# Altium PCB TIDA_010057.PcbDoc (part 9 of 9)
Units mil, origin at the board's own origin, x right, y up, seen from the top; angles counter-clockwise.
Board outline 1771.65 x 3543.31 mil, 12 copper layers (Top Layer, GND1, Signal Layer 1, GND2, POWER1, POWER2, GND4, POWER3, GND6, Signal Layer 2, GND7, Bottom Layer), stack 62.79 mil thick; 593 components, 374 nets, 1805 pads, 1029 vias.
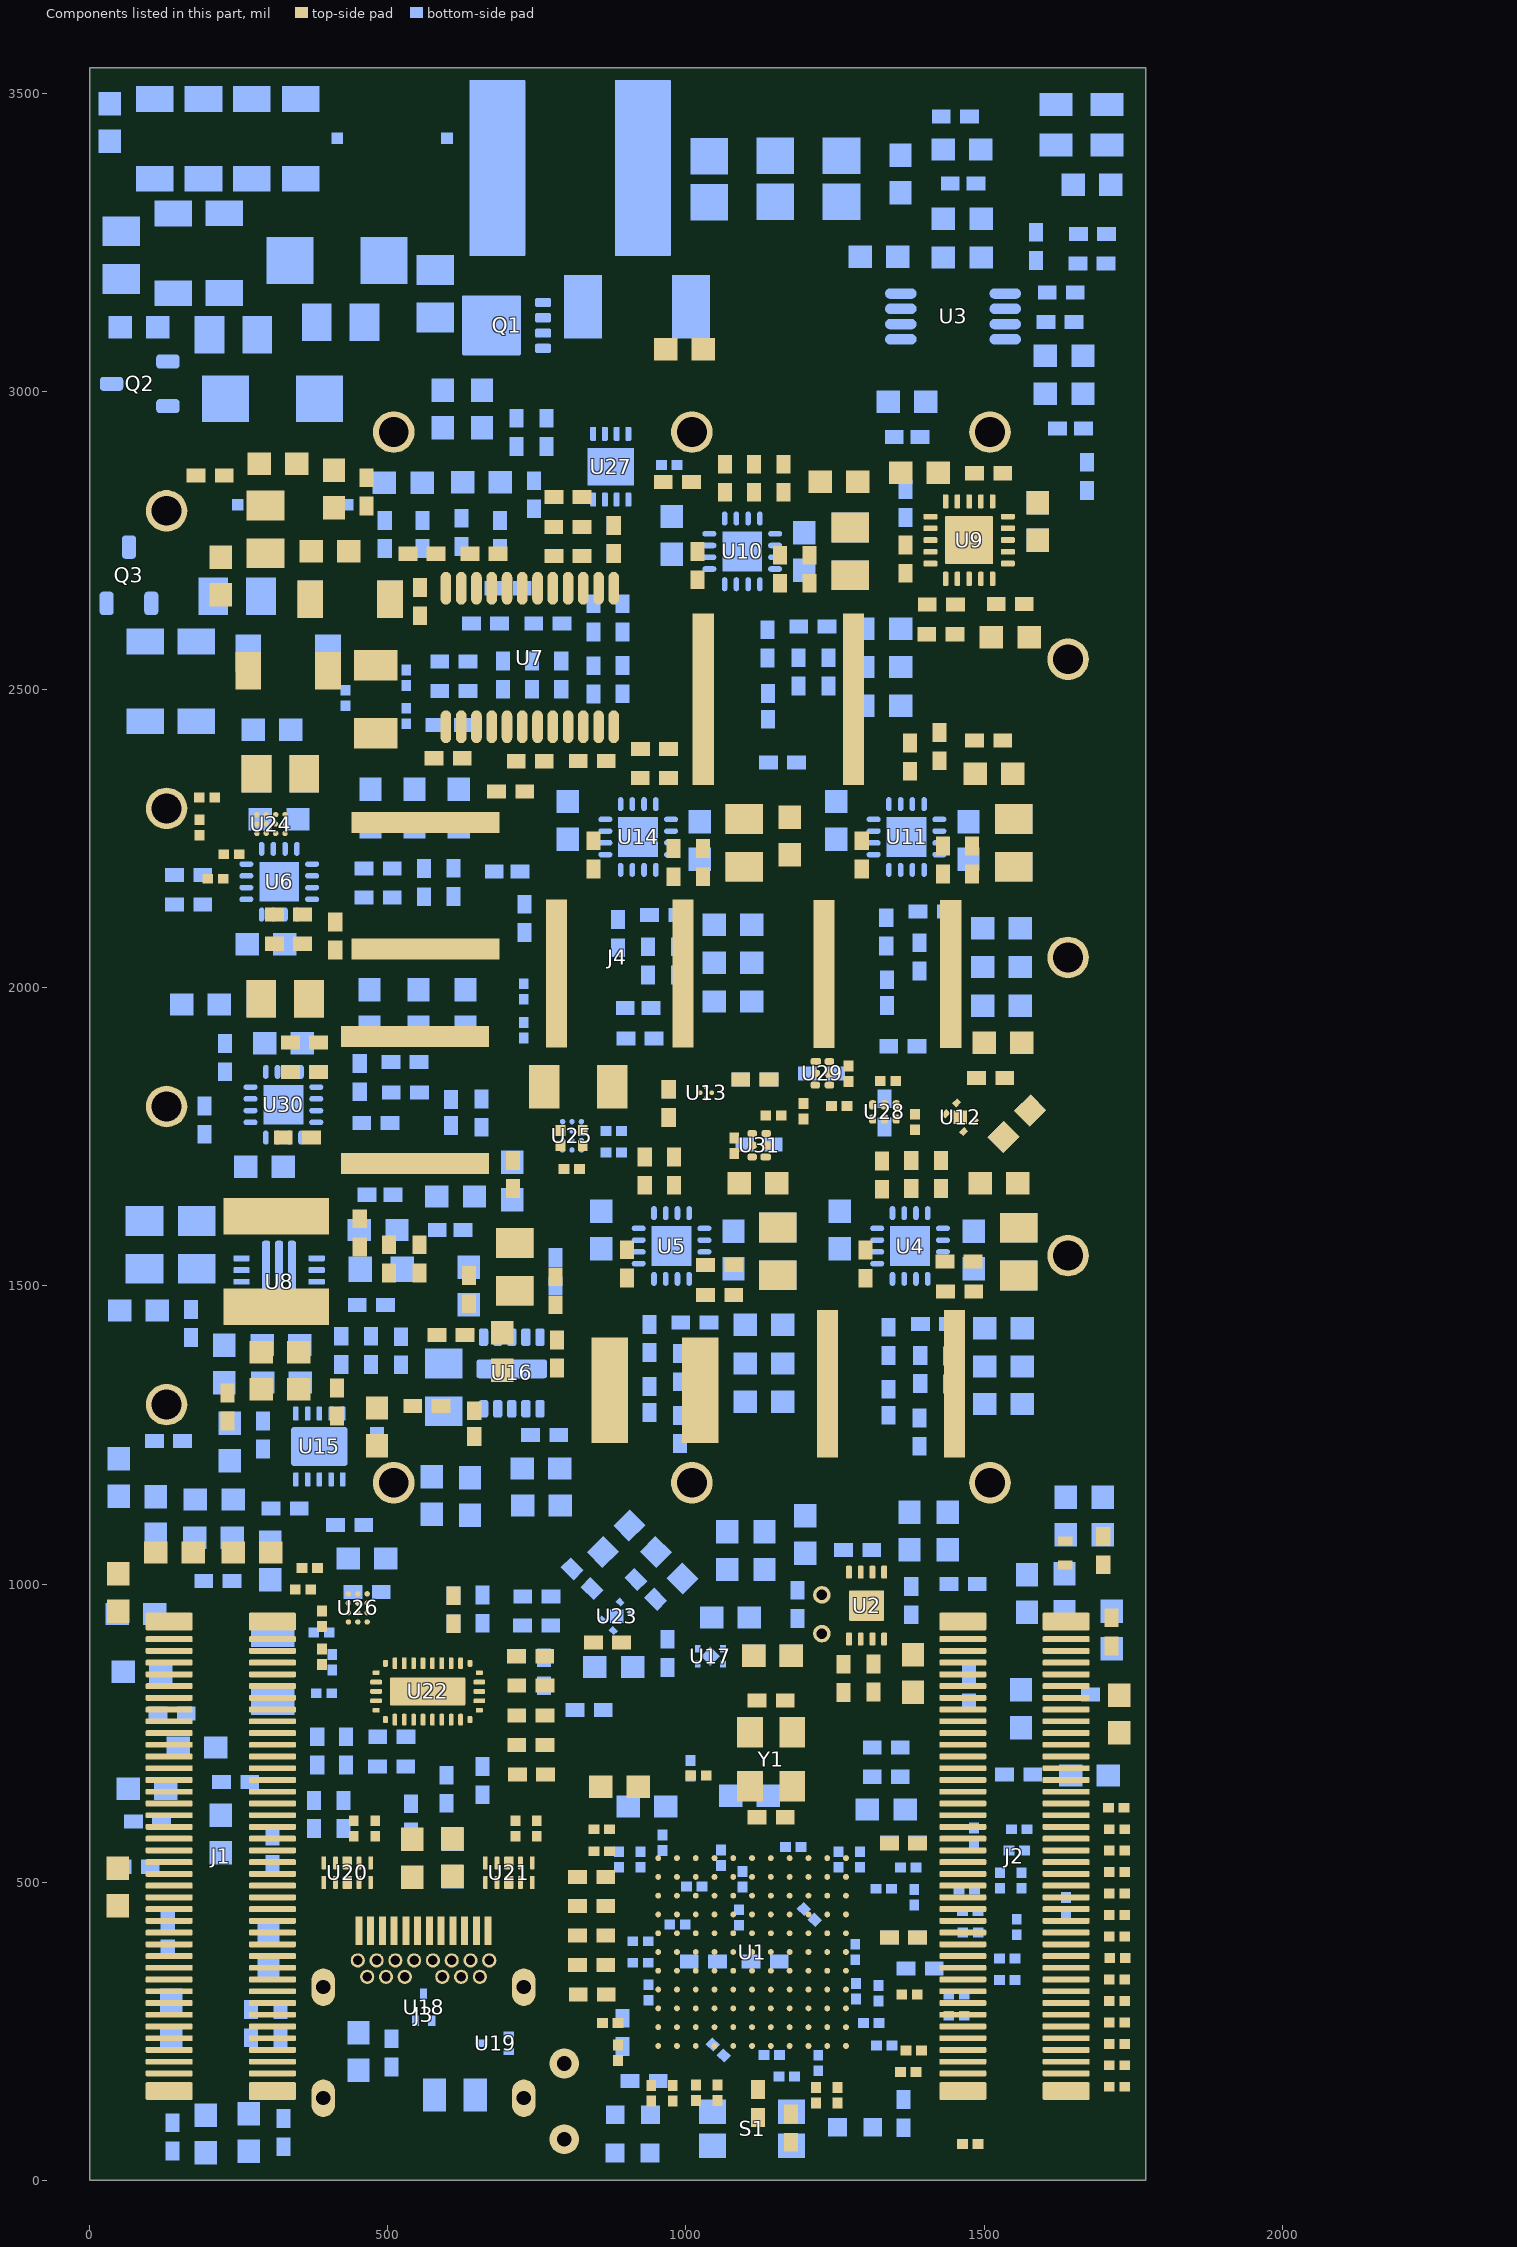
[diagram p17: the components of this part, seen from the top]

## Other copper (continued)
Bottom Layer:
  rectangle net GND_SIG: 1050,545 1071,564
  rectangle net GND_SIG: 1282,542 1301.5,560
  region net NetL42_1: 1591.58,996.08 1591.58,1040.76 1582.09,1050.25 1554.67,1050.25 1546.63,1042.21 1546.63,996.25 1546.55,996.16
  pour cut-out: 240.76,163.93 231.93,172.76 227.24,168.07 226.24,168.07 235.07,159.24
  pour cut-out: 1142.43,349.59 1136.67,355.33 1130.02,348.76 1130.02,347.75 1134.01,343.76 1136.6,343.76
  region net NetC208_2: 172,2644 131,2603 92,2603 88,2599 88,2562 91,2559 200,2559 211,2570 211,2619 232,2640 232,2677 226,2683 183,2683 172,2672
  region net NetL43_1: 16,2549 20,2545 37,2545 42,2550 42,2660 37,2665 19,2665 16,2662
  region net HVGND: 526,2684 460,2684 457,2681 457,2626 463,2620 526,2620
  region net NetL43_1: 43,1108 66,1085 66,1079 45,1058 37,1058 25,1070 25,1101 27,1103
  region net 3.3V: 1745,762 1738,769 1730,769 1709,748 1709,740 1718,731 1741,731 1745,735
  region net VBUS: 1506,1690 1512,1684 1512,1675 1491,1654 1479,1654 1459,1674 1459,1684 1465,1690
  region net VBUS: 1240,2867 1244,2863 1244,2852 1223,2831 1210,2831 1190,2851 1190,2861 1196,2867
  region net NetC80_1: 1069.5,2801 1059.5,2811 957.5,2811 957.5,2771 958.5,2770 1009.5,2770 1020.5,2781 1058,2781 1062,2777 1068,2777 1069.5,2778.5
  pour cut-out: 363,544 370,551 370,564.43 365,564.43 363,562.43
  region net VBUS: 1456.49,2376.1 1498.45,2376.22 1504.22,2370.45 1504.22,2360.67 1484.35,2340.8 1470.8,2340.8 1450.58,2361.02 1450.58,2370.19
  region net 1V8_VDD_RX: 1549.91,2556.14 1538.42,2544.66 1515.15,2544.66 1493.33,2522.83 1493.33,2509.53 1499.21,2503.65 1542.35,2503.65 1564.26,2525.56 1564.26,2550.11 1558.24,2556.13
  region net VCC_FX3_TXVDDQ: 1073,664 1095,664 1095,625 1055,625 1053,627 1053,644
  region net I2C_1V8: 1152,1018 1164,1006 1200,1006 1201,1005 1201,975 1199,973 1142,973 1113,1002 1113,1044 1152,1044
  region net VCC_FX3_VIO: 1257,1029 1263.35,1035.35 1277.35,1035.35 1281,1039 1281,1069 1278,1072 1181,1072 1181,1031 1183,1029
  region net NetC96_1: 1086,1191 1076,1181 1076,1138 1069,1131 1051,1113 1051,1068 1154,1068 1182,1096 1219,1096 1219,1191
  region net VCC_FX3_RXVDDQ: 1356,1077 1394,1077 1394,980 1356,980
  region net VCC_FX3_DVDD: 1420,1078 1458,1078 1458,990 1456,988 1423,988 1420,991
  region net NetC46_1: 1356,1140 1459,1140 1487,1112 1541,1112 1595,1166 1723,1166 1728,1161 1728,1131 1722,1125 1606,1125 1548,1067 1492,1067 1459,1100 1356,1100
  region net NetL42_1: 15,2960 22,2967 94,2967 114,2987 151,2987 151,2908 143,2900 23,2900 15,2908
  region net NetC241_1: 228,3127 94,3127 94,3038 96,3036 152,3036 154,3038 154,3059 156,3061 226,3061 228,3063
  region net "HV FB": 13,3003 16,3000 60,3000 62,3002 62,3072 74,3084 74,3135 84,3145 261,3145 261,3210 257,3214 16,3214 13,3211
  region net NetC30_1: 385,3181 297,3181 296,3182 296,3329 289,3336 103,3336 93,3326 93,3248 88,3243 18,3243 14,3247 14,3340 14,3408 14,3440 55,3440 55,3399 75,3379 385,3379
  region net NetC25_1: 453,3179 612,3179 618,3185 618,3529 616,3531 538,3531 537,3530 537,3341.08 537.53,3340.55 537.53,3306.53 506,3275 453,3275
  region net GND_SIG: 1733,975 1734,974 1734,935 1733,934 1695,934 1692,937 1692,974 1693,975
  region net PGND: 333.39,1885.39 331,1883 331,1840.5 326.78,1836.27 326.78,1812.72 329,1810.5 354.5,1810.5 357,1813 357,1879.5 351,1885.5
  region net NetC157_1: 258,1916 253,1911 253,1903 258,1898 258,1872.83 258,1831 260,1829 279,1829 281,1831 281,1838 292,1849 320,1849 320,1868 313,1875 313,1889 313,2014 263,2014 240,1991 198,1991 198,1952 200,1950 243,1950 258,1935
  region net VDD_FPGA: 176,1990 190,2004 203,2004 211,2012 211,2035 201,2045 173,2045 131,2003 131,1955.02 133.02,1953 176,1953
  region net PGND: 324,2257 324,2216 319,2211 319,2187 321,2185 347,2185 351,2189 351,2216 355,2220 355,2258 353,2260 327,2260
  region net NetC62_1: 251,2372.22 243.03,2364.25 243.03,2354.22 251,2346.27 251,2265 254,2262 254,2217 251,2214 251,2207 253,2205 274,2205 274,2213 283,2222 310,2222 313,2225 313,2242 306,2249 306,2302 305,2303 305,2447 299,2453 254,2453 251,2450
  region net NetC61_1: 634,2244.5 638,2248.5 638,2289.5 635,2292.5 614,2292.5 456,2292.5 452,2288.5 452,2247.5 455,2244.5
  region net NetC59_2: 289,2134 286,2131 286,2117.39 291.39,2112 295,2112 295,2134
  region net NetC59_1: 244,2055 245,2054 283,2054 284,2055 284,2090 283,2091 274,2091 271,2094 271,2151 252,2151 244,2143
  region net NetC83_1: 1609,2835 1609,2793 1567,2793 1562.8,2797.2 1562.8,2830.8 1567,2835
  region net PGND: 1159,2726 1165,2720 1183.5,2720 1183.5,2712 1181.5,2710 1116.5,2710 1112.5,2714 1112.5,2728.04 1121.49,2737.02 1132.5,2726
  region net NetC83_1: 1272,2444 1274,2442 1317,2442 1320,2445 1320,2462 1320,2620 1316,2624 1275,2624 1272,2621
  region net NetC80_2: 1028.5,2766 1047,2766 1051,2762 1051,2722 1047,2718 1005.5,2718 1005.5,2743
  region net NetC81_1: 1161,2805.5 1154.69,2811.82 1145.32,2811.82 1139.01,2805.5 1124.5,2805.5 1120,2801 1120,2778 1122,2776 1132.5,2776 1139.01,2769.49 1139.01,2739.99 1142,2737 1312,2737 1313.5,2738.5 1313.5,2804.5 1312.5,2805.5
  region net GND_SIG: 931,563 941,563 944,560 944,554 932,542 879.8,542 879.8,560.8 882,563
  region net GND_SIG: 886,560 901,560 901,542 886,542
  region net VCC_FX3_RXVDDQ: 975,548 971,544 968,544 964,548 964,562 974,562 975,561
  region net NetC61_1: 79,756 90,745 168,745 168,707 95,707 84.58,717.42 29.58,717.42 26,721 26,768 30,772 44,772 60,756
  region net VCC_AUX_1V8: 267,369 267,311 259,303 259,271 333,271 334,272 334,316 330,320 330,368 325,373 271,373
  region net 3.3V_AVDD: 1742,832 1743,831 1743,800 1742,799 1710,799 1710,831 1711,832
  region net 1V8_VDD_RX: 1571,908 1581,898 1581,843 1581,803 1544,803 1543,804 1543,871 1524,890 1524,904 1528,908
  region net NetC22_1: 1388,3474 1401,3487 1527,3487 1554,3460 1738,3460 1742,3464 1742,3525 1736,3531 829,3531 820,3522 820,3236 829,3227 976,3227 976,3357 986,3367 1292,3367 1302,3377 1383.54,3377 1388,3381.46
  region net NetC26_2: 1385,3353 1387,3351 1387,3162 1381,3156 1343,3156 1335,3164 1335,3350 1338,3353
  region net NetQ1_1: 749,3196 859,3196 859,3089 750,3089 746,3093 746,3193
  pour cut-out: 1153.91,229.88 1163.12,229.88 1163.12,223.12 1163,223 1154,223 1154,229.79
  region: 1619.54,1594.77
  region: 1619.54,1594.77
  region: 1619.54,1594.77
  region: 1619.54,1594.77
  region: 1619.54,1594.77
  region: 1619.54,1594.77
  region net 1.8V_AVDD: 1500,678 1519,659 1560.65,659 1566,664.35 1566,697.65 1571.35,703 1659.83,703 1666,696.83 1666,657.17 1658.83,650 1589,650 1570,631 1519,631 1504,646 1455.87,646 1453,648.87 1453,677 1454,678
  region net AVSS: 31,700 26,695 26,593 29,590 81,590 83,592 83,684 86,687 86,696 82,700
  region net GND_SIG: 86,514 148,514 150,516 150,541 157,548 177.2,548 180.61,551.41 180.61,573.16 184,576.56 152.56,576.56 124,548 124,535 97.92,535 86,523.08
  region net 1V8_AVDD_IO_TX: 190,779 211.24,779 215,782.76 215,817 208,824 196.11,824 190,817.89
  region net NetC41_1: 1432.12,1649.41 1441.1,1640.5 1597,1640.5 1598,1639.5 1598,1573.5 1596,1571.5 1421,1571.5 1419,1573.5 1419,1606.5 1414.5,1611 1403,1611 1401,1613 1401,1639.5 1402,1640.5 1420.72,1640.5 1429.63,1649.41
  region net NetC39_1: 1351,1636 1341,1646 1239,1646 1239,1606 1240,1605 1291,1605 1302,1616 1339,1616 1344,1611 1349,1611 1351,1613
  region net NetC39_2: 1306,1601 1329,1601 1332,1598 1332,1555 1329,1552 1285,1552 1285,1580
  region net NetC46_1: 1519,1456 1521,1454 1521,1282 1519,1280 1478,1280 1476,1282 1476,1454 1478,1456
  region net PGND: 1443.71,1562 1457.1,1548.62 1457.1,1534.1 1418.8,1495.8 1406.2,1495.8 1400.86,1501.14 1400.86,1523.07 1390.93,1533 1343,1533 1343,1600 1409,1600 1409,1564 1411,1562
  region net NetC56_1: 1018.95,1640.5 1026.31,1647.86 1034.63,1647.86 1041.98,1640.5 1194,1640.5 1195,1639.5 1195,1573.5 1022.5,1573.5 1020,1576 1020,1608 1017,1611 1003,1611 1001,1613 1001,1631 1010.5,1640.5
  region net NetC54_1: 951,1636 941,1646 839,1646 839,1606 840,1605 891,1605 902,1616 940,1616 945,1611 948,1611 951,1614
  region net NetC54_2: 858,1583 893,1583 911,1601 930,1601 933,1598 933,1557 928,1552 858,1552
  region net NetC96_1: 1074,1274 1076,1272 1119,1272 1122,1275 1122,1292 1122,1450 1118,1454 1077,1454 1074,1451
  region net PGND: 1049,1561 1065,1545 1065,1510 1028,1510 1003.71,1534.29 1003.71,1561.71 1005,1563 1009,1563 1011,1561
  region net NetC103_1: 1554.34,2333.12 1560.96,2326.5 1588,2326.5 1589,2325.5 1589,2259.5 1587.5,2258 1417,2258 1414,2261 1414,2291 1408,2297 1398,2297 1395,2300 1395,2323 1398.5,2326.5 1539.19,2326.5 1545.8,2333.12
  region net NetC102_1: 1345,2322 1335,2332 1233,2332 1233,2292 1234,2291 1285,2291 1296,2302 1333,2302 1338,2297 1343,2297 1345,2299
  region net NetC102_2: 1287,2270 1304,2287 1323,2287 1326,2284 1326,2256 1323,2253 1290,2253 1287,2256
  region net NetC110_1: 1521,2130.01 1516.01,2135 1471,2135 1466.02,2130.02 1466.02,1955 1471.02,1950 1516.01,1950 1521,1954.99
  region net PGND: 1444,2247 1457,2234 1457,2210 1456,2209 1401,2209 1397.58,2212.42 1397.58,2249.58 1400.5,2252.5 1406,2247
  region net 3.3V: 1454,1758 1452,1756 1452,1718 1459,1711 1547,1711 1565,1729 1565,1745 1534,1776 1533,1776 1515,1758
  region net NetC196_1: 993.37,2328.84 996.23,2325.99 996.82,2326 1138.5,2326 1139,2325.5 1139,2259.5 1137.5,2258 966,2258 963,2261 963,2291 958,2296 947,2296 944,2299 944,2322 948,2326 980,2326 982.84,2328.84
  region net NetC176_1: 895,2322 885,2332 783,2332 783,2292 784,2291 835,2291 846,2302 881.5,2302 888,2295.5 894,2295.5 895,2296.5
  region net NetC176_2: 855,2288 875,2288 877,2286 877,2241 875,2239 831,2239 831,2264
  region net NetC132_1: 1022,1945 1024,1943 1067,1943 1070,1946 1070,1963 1070,2121 1066,2125 1025,2125 1022,2122
  region net PGND: 991,2248 1003,2236 1003,2208.21 996.95,2202.16 954.61,2202.16 937,2219.78 937,2248
  region net NetC198_1: 1106,1874 1108,1872 1108,1834 1064,1834 1061,1837 1061,1872 1063,1874
  region net NetC132_1: 999.26,1816.01 996.24,1813 958,1813 958,1856.76 962.26,1861.01 997.26,1861.01 999.26,1859.01
  region net NetC116_2: 267.9,1565 267,1565.9 267,1614 236.95,1614 235.87,1612.91 235.87,1589.8 241,1584.67 241,1543 242,1542 268,1542
  region net NetC116_1: 304,1587 284.79,1587 276.96,1594.83 277,1612.05 277,1624 282,1629 319,1629 342,1606 342,1597 336,1591 331,1591 325,1585 325,1441 322,1438 314,1438 311,1441 311,1580
  region net PGND: 351,1657 292,1657 280,1669 76,1669 60,1653 60,1586 62,1584 220,1584 220,1628 232,1640 335,1640 350,1625 350,1591 333,1574 333,1536 345,1536 345,1556 369,1580 369,1639
  region net NetC120_1: 266,1421 289,1444 289,1573 292,1576 301,1576 303,1574 303,1425 310,1418 310,1318 266,1318
  region net GND_A7: 495,1626 493,1628 493,1653 519,1653 535,1637 535,1626 535,1579 544,1570 544,1506 503,1506 503,1556 495,1564
  region net PGND: 785,1309 803,1291 803,1218 808,1213 808,1175 769,1175 769,1214 771,1216 771,1275.36 767.36,1279 750,1279 748,1281 748,1307 750,1309
  region net NetC187_1: 793,1471 789,1467 722,1467 716,1461 716,1402 714,1400 702,1400 700,1402 700,1460 692,1468 682,1468 682,1517 790,1517 793,1514
  region net VTX_5V: 765,1633 768,1636 790,1636 794,1632 794,1531 765,1531
  region net NetC188_2: 768,1376 766,1378 673,1378 669,1382 669,1426 666,1429 608,1429 601,1436 587,1436 562,1411 562,1345 766,1345 768,1347
  region net NetC181_1: 447,1278 432,1278 429,1275 424,1275 420,1279 420,1283.75 422.25,1286 446.34,1286 447,1285.34
  region net "ALTERNATE HV INPUT": 370,1274 321.67,1274 305.67,1258 286,1258 286,1290 303,1290 310.76,1297.76 370,1297.76
  region net PGND: 565,1261 567,1259 567,1249 565,1247 494,1247 492,1249 472.22,1249 463.66,1257.55 467,1261
  region net NetC121_1: 320,1064 308,1052 226,1052 219,1059 219,1156 224,1161 283,1161 309,1187 350,1187 350,1163 335.5,1163 320,1147.5 320,1112
  region net PGND: 272,1199 350,1199 350,1206 331,1225 272,1225
  region net NetC190_2: 446.02,1085.98 463.02,1085.98 477,1072 477,1024 516,1024 517,1025 517,1075 528,1085.98 649.98,1085.98 659,1095 659,1135 658,1136 555,1136 542,1123 485,1123 458,1150 458,1179 451,1186 420,1186 420,1139 444,1115 444,1088
  region net TX_5V: 322,1028 226,1028 221,1023 221,995 223,993 277,993 283,987 321,987 322,988
  region net TX_-5V: 414,1061 415,1062 453,1062 453,1004 457,1000 457,975 415,975 411,979 411,1059 414,1062
  region net VTX_5V: 70,1437.5 94,1413.5 94,1351 89,1346 67,1346 30,1383 30,1476 32,1478 70,1478
  region net VBUS: 512,2453 514,2451 538,2451 540,2449 540,2407 536,2403 452,2403 446,2409 446,2446 453,2453
  region net VTX_5V: 508,2567 530,2567 540,2557 540,2524.02 517.02,2524.02 510,2517 487.17,2517 452,2517 446,2523 446,2561 452,2567
  region net GND_SIG: 1248,560 1258,570 1266,570 1270,566 1270,560 1264,554 1264,542 1248,542
  region net VCC_FX3_VIO: 938,534 944,528 944,522 938,516 879,516 879,534
  region net NetC36_2: 244.5,2580.5 244.5,2593.5 249,2598 262,2611 262,2688 244.33,2705.67 232.73,2705.67 232.73,2914.33 311.47,2914.33 311.47,2727.53 355,2684 393,2684 393,2620 350,2620 331,2601 331,2543 317,2529 244,2529 244,2580
  region net VCC_3.3V_CDCE: 1018,963 987,932 962,932 957,927 957,892 1008.71,892 1014.71,886 1024,886 1033.13,895.13 1033.13,922.13 1035,924 1064,924 1064,963
  region net NetC164_1: 1058,886 1080,886 1083,883 1083,860 1087,856 1132,856 1134,858 1134,908 1132,910 1051,910 1049,908 1049,895
  region net HVM: 66,975 29,975 26,972 26,929 30,925 65.98,925 67,926.02 67,974
  region net HVGND: 109,3321 258,3321 258,3277 109,3277
  region net FX3_I2C_SDA: 1272,883 1265,890 1264.5,890 1264.5,875 1272,882.5
  region net NetC96_1: 319,457 314,462 199,462 186,449 186,443 199,443 207,451 274,451 281,444 281,405 319,405
  region net AVSS: 89,969 139,969 176,1006 176,1017 208,1017 208,994 193,979 183,979 150,946 150,910 93,910 89,914
  pour cut-out: 166,432 156,432 154,430 154,418 156,416 165,416 167,418 167,431
  pour cut-out: 1248,814 1241,807 1240,807 1250,797 1252,797 1257,802 1257,804
  text "'.Layer_Name'" at 584,-859 h60

## Silkscreen, mask and mechanical layers (free items; w line width, h text height)
Top Overlay:
  drawing of 168 lines, arcs and shapes, not listed
  text "REV:E2" at 636,3351 h40
  text "TIDA-010057" at 550,3342 h40
  text "A" at 917,1030 h25
  text "A" at 763,375 h25
  text ".Layer_Name" at 577,-858.49 h60
Bottom Overlay:
  lines w4: 1210.39,906.28 ccw(c1228,917) 1215,933 ; 1210.39,971.28 ccw(c1228,982) 1215,998
  lines w6: 321,1259 321,1304 334,1304 387,1304 ; 418,1151 442,1151 442,1173 ; 628,3229 628,3535 987,3535 987,3231 ; 766,233 836,233 836,169 ; 782,107 834,107 834,46 ; 838,926 803,891 803,834 817,820 889,820 ; 1364,1478 1377,1478 1381,1474 1381,1464 ; 1403.02,3433.27 1396.73,3433.27 1390,3440 1390,3446.28 1390,3504 1395,3509 1417,3509 ; 1574.15,3526.67 1578.89,3531.41 1683.82,3531.41 1689.93,3525.29 1689.93,3519.06
  lines w8: 149.6,2927.8 149.6,2940.16 151.11,2941.67 159.55,2941.67 ; 329.25,3062.55 430.23,3062.55 444.4,3048.38 444.4,3038.73 ; 346.66,1571.96 372.79,1571.96 ; 392.47,1558.41 392.47,1564.09 ; 726.72,2988.87 726.72,2993.93 730.65,2997.85 764.71,2997.85 782.68,3015.82 782.68,3036.81 782.68,3038.66 ; 775.7,2987.49 782.69,2994.49 796.91,2994.49 ; 1704.56,2976.3 1730.63,2976.3
  text "SDA" at 1323,969 h25
  text "SCL" at 1323,905 h25
  text "VBUS_USB" at 755,45 h25
  text ".Layer_Name" at 577,-858.49 h60
Top Paste:
  rectangle: 1380,1906 1457,2141
  rectangle: 1219,1905 1293,2139
  rectangle: 1202,2350 1295,2620
  rectangle: 1019,2349 1105,2620
  rectangle: 930,1908 1006,2141
  rectangle: 770,1906 845,2141
  rectangle: 447,2057 679,2127
  rectangle: 446,2213 680,2290
  rectangle: 430,1691 664,1770
  rectangle: 428,1854 661,1931
  region: 1464,1454 1393,1454 1393,1217 1464,1217
  rectangle: 1226,1217 1297,1454
  text ".Layer_Name" at 577,-858.49 h60
Bottom Paste:
  text ".Layer_Name" at 577,-858.49 h60
Top Solder:
  rectangle: 1375.41,1897 1462.02,2147.02
  rectangle: 1213.98,1898 1300,2147.02
  rectangle: 1196.34,2340.3 1298.7,2627.7
  rectangle: 1011.3,2340.3 1113.66,2627.7
  rectangle: 438.99,2046.87 687.01,2133.89
  region: 670.02,1775 421.99,1775 421.99,1687.69 670.02,1687.69
  region: 670.01,1936.13 421.99,1936.13 421.99,1849.4 670.01,1849.4
  region: 852.3,1899.98 852.3,2148.01 765.69,2148.01 765.69,1899.98
  region: 1014.13,1899.99 1014.13,2148.01 927.11,2148.01 927.11,1899.99
  rectangle: 438.98,2208.7 687.01,2295.31
  rectangle: 1381.41,1211.98 1468.02,1460.02
  rectangle: 1219.98,1211.98 1309,1460.02
  region: 1448.57,1794.41 1471.4,1794.41 1471.46,1794.34 1471.46,1771.58 1448.6,1771.58 1448.57,1771.62
  region: 1454.99,1814.74 1446.36,1806.11 1453.34,1799.13 1464.99,1799.13 1467.79,1801.93
  region: 1478.92,1790.79 1491.73,1777.98 1483.11,1769.36 1476.13,1776.34 1476.13,1787.99
  region: 1436.89,1796.63 1428.26,1788.01 1441.07,1775.2 1443.87,1778.01 1443.87,1789.65
  region: 1455.01,1766.87 1466.67,1766.87 1473.65,1759.9 1464.98,1751.23 1452.17,1764.03
  text ".Layer_Name" at 577,-858.49 h60
  text ".Layer_Name" at 577,-858.49 h60
Bottom Solder:
  region: 1041.08,895.36 1041.07,895.36 1024.76,879.06 1041,862.82 1057.17,878.99 1057.18,878.99 1057.18,879.26 1041.07,895.36
  region: 895.48,934.43 895.43,934.37 872.48,934.37 872.39,934.46 872.39,957.37 872.51,957.49 895.48,957.49
  region: 1048.87,897.97 1066.98,897.97 1066.98,885.69 1057.11,885.69 1048.87,893.93
  region: 1048.87,860.1 1048.87,864.07 1050.82,866.02 1057.18,872.38 1066.98,872.38 1066.98,860.1
  region: 1033.13,897.92 1015.02,897.92 1015.02,885.69 1024.95,885.69 1033.13,893.87
  region: 1024.93,872.33 1014.96,872.33 1014.96,860.13 1033.2,860.13 1033.2,864.06
  region: 897.64,969.11 889.01,977.74 876.2,964.93 878.99,962.14 890.65,962.11
  region: 907.07,959.68 915.74,951.01 902.93,938.21 900.13,941.01 900.13,952.74
  region: 865.17,953.89 852.33,941.05 860.96,932.42 867.87,939.34 867.87,951.19
  region: 877.35,929.87 888.99,929.87 891.79,927.07 878.99,914.26 870.37,922.89
  region: 318.1,1216.42 318.1,1245.76 338.75,1266.42 432.21,1266.42 452.65,1245.99 452.65,1215.81 432.76,1195.92 338.59,1195.92
  text ".Layer_Name" at 577,-858.49 h60
Drill Guide:
  text ".Layer_Name" at 577,-858.49 h60
M1 Board Outline:
  the board outline again, w10
M2 Board Dimensions:
  rectangle: 125,-400 500,-275
  rectangle: 0,-275 125,-150
  lines w7: 0,-275 1000,-275 ; 125,-400 125,-150 ; 250,-400 250,-150 ; 500,-400 500,-150 ; 750,-400 750,-150 ; 0,-400 0,-150 1000,-150 1000,-400 0,-400
  lines w10: 0,0 0,3543.31 1771.65,3543.31 1771.65,0 0,0
M3 3D STEP Top:
  text ".Layer_Name" at 577,-858.49 h60
M4 3D STEP Bottom:
  text ".Layer_Name" at 577,-858.49 h60
M5 Assembly Top:
  circle w4: c1228,917 r18.44
  circle w4: c1228,982 r18.44
  circle w4: c796,69 r29.73
  circle w4: c796,196 r29.73
  lines w3: 392,994 404,994 420,1010 420,1011 ; 1043.29,1854.08 1049.14,1848.22 1049.14,1841.99 1044.74,1837.59 ; 1475.97,1800.99 1482.48,1807.5 1488.35,1807.5 1493.46,1802.39 ; 1524,67 1668,67 1679,78 1679,567 ; 1682,574 1682,688 ; 1679,567 1675,563 1683,563 1679,567 ; 1682,688 1678,684 1686,684 1682,688
  lines w4: 1055,1733 1062,1733 ; 1288.75,1885.53 1295.47,1885.53 ; 203,1429 423,1429 423,1651 207,1651 203,1651 203,1429 ; 419,1685 419,1940 674,1940 674,1685 419,1685 ; 438.03,2044 691,2044 691,2299 438.03,2299 438.03,2044 ; 762,1896.08 762,2151.08 1017,2151.08 1017,1896.08 762,1896.08 ; 836,1215 1061,1215 1061,1437 844,1437 836,1437 836,1215 ; 1012,2341.3 1306.7,2341.3 1306.7,2627.7 1012.7,2627.7 1012,2627 1012,2341.3 ; 1214,1896.08 1214,2151.08 1466,2151.08 1466,1896.08 1214,1896.08 ; 1216,1209 1216,1459 1471,1459 1471,1209 1216,1209
  lines w10: -292,-930.17 6308,-930.17 ; -292,-726.83 6310,-726.83 ; -292,-523.5 -292,-1133.5 3713,-1133.5 6310,-1133.5 6310,-523.5 -291.5,-523.5 -291.5,-1133.5 1284,-1133.5 ; 2173,-1133.5 2173,-523.5 ; 3440,-726.83 3440,-523.5 ; 4280,-726.83 4280,-523.5 ; 4902,-1140 4902,-937.17
  text "L13" at 1123,2483 h30
  text "L11" at 530,2184 h30
  text "L25" at 864,2018 h20
  text "L24" at 1314,2007 h20
  text "L27" at 511,1804 h30
  text "L19" at 274,1527 h20
  text "L6" at 1323,1315 h20
  text "L17" at 913,1305 h30
  text "SDA" at 1147,974 h20
  text "SCL" at 1148,919 h20
  text "PGND" at 761,137 h20
  text "VBUS_USB" at 747,12 h20
  text "COMPONENTS MARKED 'DNP' SHOULD NOT BE POPULATED." at 3459.5,-330.5 h60
  text "ASSEMBLY VARIANT:" at 3459,-446 h60
  text ".VariantName" at 4495,-446 h60
  text "PCB VIEWED FROM TOP SIDE" at -228.5,-655.67 h60
  text "BOARD #:" at 2248,-655.67 h60
  text ".PRJ_Number" at 2793.5,-655.67 h60
  text "REV:" at 3638,-655.67 h60
  text ".PCB_Rev" at 3929.5,-655.67 h60
  text "SVN REV:" at 4476,-655.67 h60
  text ".VersionControl_RevNumber" at 4982,-655.67 h30
  text "'.Layer_Name'" at 926,-847 h60
  text "TID #:" at 2248,-859 h60
  text ".TID" at 2793.5,-859 h60
  text "PLOT NAME =" at -228.5,-1064.34 h60
  text ".plot_File_Name" at 577,-1064.34 h60
  text "GENERATED    :" at 2250,-1064.34 h60
  text ".Print_Date" at 3119.5,-1064.34 h60
  text ".Print_Time" at 3848.5,-1064.34 h60
  text "TEXAS INSTRUMENTS" at 5113,-1064.34 h60
M6 Assembly Bottom:
  lines w3: 1277,582 1289,582 1292,579 1292,571 ; 1343,311 1352,311 ; 1406,524 1413,524 ; 1441,454 1444,454 ; 1489,322 1494,322 1497,319 1497,316
  lines w10: -292.5,-727.33 6309.5,-727.33 ; -290.5,-930.67 6309.5,-930.67 ; 1115.5,-1140.5 1115.5,-937.67 ; 1737.5,-727.33 1737.5,-524 ; 2577.5,-727.33 2577.5,-524 ; 3844.5,-1134 3844.5,-524 ; 4733.5,-1134 6309,-1134 6309,-524 -292.5,-524 -292.5,-1134 2304.5,-1134 6309.5,-1134 6309.5,-524
  text "COMPONENTS MARKED 'DNP' SHOULD NOT BE POPULATED." at 6102,-318 h60
  text ".VariantName" at 5058,-434 h60
  text "ASSEMBLY VARIANT:" at 6097,-434 h60
  text ".VersionControl_RevNumber" at 1035.5,-656.17 h20
  text "SVN REV:" at 1541.5,-656.17 h20
  text ".PCB_Rev" at 2088,-656.17 h60
  text "REV:" at 2379.5,-656.17 h60
  text ".PRJ_Number" at 3224,-656.17 h60
  text "BOARD #:" at 3769.5,-656.17 h60
  text "PCB VIEWED FROM BOTTOM SIDE" at 6246,-656.17 h60
  text "'.Layer_Name'" at 5287,-847 h60
  text ".TID" at 3224,-859.5 h60
  text "TID #:" at 3769.5,-859.5 h60
  text "TEXAS INSTRUMENTS" at 904.5,-1064.84 h60
  text ".Print_Time" at 2169,-1064.84 h60
  text ".Print_Date" at 2898,-1064.84 h60
  text "GENERATED    :" at 3767.5,-1064.84 h20
  text ".plot_File_Name" at 5440.5,-1064.84 h60
  text "PLOT NAME =" at 6246,-1064.84 h60
M9 Title Sheet:
  drawing of 57 lines, arcs and shapes, not listed
  text "1" at 739.84,8036.5 h70
  text "2" at 3235.5,8036.5 h70
  text "3" at 5724.84,8036.5 h70
  text "4" at 8231.51,8036.5 h70
  text "5" at 10730.5,8036.5 h70
  text "6" at 13235.5,8036.5 h70
  text "A" at -416.5,6893.5 h70
  text "A" at 14383.5,6893.5 h70
  text "B" at -416.5,4513.5 h70
  text "B" at 14383.5,4513.5 h70
  text "C" at -416.5,2138.5 h70
  text "C" at 14383.5,2138.5 h70
  text "PROJECT TITLE:" at 11343.5,277.5 h45
  text ".PRJ_Title" at 11393.5,144.17 h70
  text "DESIGNED FOR:" at 11343.5,-23.5 h45
  text ".PRJ_Customer" at 11393.5,-163.5 h70
  text "D" at -416.5,-231.5 h70
  text "D" at 14383.5,-231.5 h70
  text "FILE NAME:" at 11343.5,-323.5 h45
  text ".PCB_File_Name_No_Path" at 11393.5,-443.5 h70
  text "Texas Instruments (TI) and/or its licensors do not warrant the accuracy or completeness of this specification" at 6374,-605.34 h45
  text "ENGINEER:" at 11343.5,-613.5 h45
  text "LAYOUT BY:" at 12848.5,-613.5 h45
  text "or any information contained therein. TI and/or its licensors do not warrant that this design will meet" at 6329.01,-718 h45
  text "TESSOLVE" at 13187,-756 h60
  text ".PRJ_Engineer" at 11393.5,-768.49 h70
  text "the specifications, will be suitable for your application or fit for any particular purpose, or will operate in" at 6329.01,-830.67 h45
  text "ALTIUM DESIGNER VERSION:" at 12848.5,-923.5 h45
  text "an implementation. TI and/or its licensors do not warrant that the design is production worthy. You should" at 6329.01,-943.33 h45
  text "completely validate and test your design implementation to confirm the system functionality for your application." at 6374,-1056 h45
  text ".print_Scale" at 11393.5,-1056.83 h70
  text ".Application_BuildNumber" at 12899,-1056.83 h70
  text "1" at 739.84,-1263.5 h70
  text "2" at 3235.5,-1263.5 h70
  text "3" at 5724.84,-1263.5 h70
  text "4" at 8231.51,-1263.5 h70
  text "5" at 10730.5,-1263.5 h70
  text "6" at 13235.5,-1263.5 h70
M10 Fab Notes:
  drawing of 900 lines, arcs and shapes, not listed
  text "Layer" at 5845.5,7518.5 h60
  text "Name" at 6255.41,7518.5 h60
  text "Material" at 7195.15,7518.5 h60
  text "Thickness" at 8054.92,7518.5 h60
  text "Constant" at 8704.76,7518.5 h60
  text "Board Layer Stack" at 9274.62,7518.5 h60
  text "1" at 5845.5,7398.5 h60
  text "Top Overlay" at 6255.41,7398.5 h60
  text "2" at 5845.5,7278.5 h60
  text "Top Solder" at 6255.41,7278.5 h60
  text "Solder Resist" at 7195.15,7278.5 h60
  text "1.00mil" at 8054.92,7278.5 h60
  text "3.5" at 8704.76,7278.5 h60
  text "3" at 5845.5,7158.5 h60
  text "Top Layer" at 6255.41,7158.5 h60
  text "Copper" at 7195.15,7158.5 h60
  text "2.60mil" at 8054.92,7158.5 h60
  text "4" at 5845.5,7038.5 h60
  text "Dielectric1" at 6255.41,7038.5 h60
  text "FR-4 High_Tg" at 7195.15,7038.5 h60
  text "4.16mil" at 8054.92,7038.5 h60
  text "4.2" at 8704.76,7038.5 h60
  text "5" at 5845.5,6918.5 h60
  text "GND1" at 6255.41,6918.5 h60
  text "Copper" at 7195.15,6918.5 h60
  text "0.71mil" at 8054.92,6918.5 h60
  text "VENDOR MAY ADJUST SOLDERMASK WHEREVER SOLDAR MASK PADS ARE THE SAME SIZE (1:1) AS PER THE MANUFACTURING CAPABILITIES  AND ALL OTHER SOLDER MASK PADS SHALL NOT BE MODIFIED." at 10415,6826 h60
  text "6" at 5845.5,6798.5 h60
  text "Dielectric 2" at 6255.41,6798.5 h60
  text "FR-4 High_Tg" at 7195.15,6798.5 h60
  text "4.49mil" at 8054.92,6798.5 h60
  text "4.2" at 8704.76,6798.5 h60
  text "THIS IS AN IMPEDANCE CONTROL BOARD." at 11308,6711 h60
  text "7" at 5845.5,6678.5 h60
  text "Signal Layer 1" at 6255.41,6678.5 h60
  text "Copper" at 7195.15,6678.5 h60
  text "0.71mil" at 8054.92,6678.5 h60
  text "VIA FILLING  WITH CONDUCTIVE MATERIAL IS REQUIRED." at 11308,6606 h60
  text "8" at 5845.5,6558.5 h60
  text "Dielectric 3" at 6255.41,6558.5 h60
  text "FR-4 High_Tg" at 7195.15,6558.5 h60
  text "5.73mil" at 8054.92,6558.5 h60
  text "4.2" at 8704.76,6558.5 h60
  text "ALL VIAS ARE  TENTED,EXCEPT VIAS ON PAD AND THERMAL VIAS." at 10867,6500 h60
  text "9" at 5845.5,6438.5 h60
  text "GND2" at 6255.41,6438.5 h60
  text "Copper" at 7195.15,6438.5 h60
  text "0.71mil" at 8054.92,6438.5 h60
  text "DESIGN INFORMATION" at 12382.02,6356.17 h60
  text "10" at 5845.5,6318.5 h60
  text "Dielectric 4" at 6255.41,6318.5 h60
  text "FR-4 High_Tg" at 7195.15,6318.5 h60
  text "4.49mil" at 8054.92,6318.5 h60
  text "4.2" at 8704.76,6318.5 h60
  text "MIN. TRACK WIDTH:" at 11737.46,6224.05 h60
  text "MIL" at 12988.46,6224.05 h60
  text "4" at 12835,6223 h60
  text "11" at 5845.5,6198.5 h60
  text "POWER1" at 6255.41,6198.5 h60
  text "Copper" at 7195.15,6198.5 h60
  text "0.71mil" at 8054.92,6198.5 h60
  text "4.72" at 12748,6102 h60
  text "MIN. CLEARANCE:" at 11737.46,6099.92 h60
  text "MIL" at 12988.46,6099.92 h60
  text "12" at 5845.5,6078.5 h60
  text "Dielectric 5" at 6255.41,6078.5 h60
  text "FR-4 High_Tg" at 7195.15,6078.5 h60
  text "4.13mil" at 8054.92,6078.5 h60
  text "4.2" at 8704.76,6078.5 h60
  text "MIN. VIA PAD SIZE:" at 11737.46,5975.8 h60
  text "12" at 12803.71,5975.8 h60
  text "MIL" at 12988.46,5975.8 h60
  text "13" at 5845.5,5958.5 h60
  text "POWER2" at 6255.41,5958.5 h60
  text "Copper" at 7195.15,5958.5 h60
  text "0.71mil" at 8054.92,5958.5 h60
  text "0.05mm (2MIL)" at 12432.46,5845.9 h60
  text "14" at 5845.5,5838.5 h60
  text "Dielectric 6" at 6255.41,5838.5 h60
  text "FR-4 High_Tg" at 7195.15,5838.5 h60
  text "4.49mil" at 8054.92,5838.5 h60
  text "4.2" at 8704.76,5838.5 h60
  text "MINIMUM ANNULAR RING" at 11408.23,5837.67 h60
  text "EXTERNAL" at 13140.46,5837.67 h60
  text "PER" at 11608.23,5727.55 h60
  text "IPC-D-275 CLASS 2 LEVEL C" at 11828.23,5727.54 h60
  text "15" at 5845.5,5718.5 h60
  text "GND4" at 6255.41,5718.5 h60
  text "Copper" at 7195.15,5718.5 h60
  text "0.71mil" at 8054.92,5718.5 h60
  text "MIL, HOLES" at 13316.46,5627.07 h60
  text "+/-" at 12924,5618.48 h60
  text "+/-" at 13778,5618.48 h60
  text "REGISTRATION TOLERANCES:" at 11408.23,5617.42 h60
  text "METAL" at 12608,5617.42 h60
  text "5" at 13184.2,5617.42 h60
  text "3" at 14017.2,5617.42 h60
  text "MIL" at 14133.46,5617.42 h60
  text "16" at 5845.5,5598.5 h60
  text "Dielectric 7" at 6255.41,5598.5 h60
  text "FR-4 High_Tg" at 7195.15,5598.5 h60
  text "4.13mil" at 8054.92,5598.5 h60
  text "4.2" at 8704.76,5598.5 h60
  text "HOLE SIZE TOLERANCE (UNLESS OTHERWISE SPECIFIED):" at 11408.23,5519.1 h60
  text "+/-" at 13778,5516.23 h60
  text "3" at 14017.2,5515.17 h60
  text "MIL" at 14133.46,5515.17 h60
  text "17" at 5845.5,5478.5 h60
  text "POWER3" at 6255.41,5478.5 h60
  text "Copper" at 7195.15,5478.5 h60
  text "0.71mil" at 8054.92,5478.5 h60
  text "MATERIAL:" at 11333.46,5377.52 h60
  text "18" at 5845.5,5358.5 h60
  text "Dielectric 8" at 6255.41,5358.5 h60
  text "FR-4 High_Tg" at 7195.15,5358.5 h60
  text "4.49mil" at 8054.92,5358.5 h60
  text "4.2" at 8704.76,5358.5 h60
  text "FR-4 High Tg" at 12319.9,5249 h60
  text "X" at 12175.46,5241.01 h60
  text "19" at 5845.5,5238.5 h60
  text "GND6" at 6255.41,5238.5 h60
  text "Copper" at 7195.15,5238.5 h60
  text "0.71mil" at 8054.92,5238.5 h60
  text "FR-408" at 11754.46,5236.49 h60
  text "OTHER" at 13242.46,5236.49 h60
  text "20" at 5845.5,5118.5 h60
  text "Dielectric 9" at 6255.41,5118.5 h60
  text "FR-4 High_Tg" at 7195.15,5118.5 h60
  text "5.73mil" at 8054.92,5118.5 h60
  text "4.2" at 8704.76,5118.5 h60
  text "OTHER" at 13530,5098.24 h60
  text "66.564MIL (1.690mm) +/-10%" at 12074.56,5093.46 h60
  text "X" at 11954.46,5091.01 h60
  text "THICKNESS:" at 11408.23,5085.24 h60
  text "21" at 5845.5,4998.5 h60
  text "Signal Layer 2" at 6255.41,4998.5 h60
  text "Copper" at 7195.15,4998.5 h60
  text "0.72mil" at 8054.92,4998.5 h60
  text "TOLERANCE:" at 11408.23,4946.92 h60
  text "X" at 12256.46,4946.92 h60
  text "ANSI IPC-6012 TYPE 3 CLASS 2" at 12434.48,4946.92 h60
  text "22" at 5845.5,4878.5 h60
  text "Dielectric 10" at 6255.41,4878.5 h60
  text "FR-4 High_Tg" at 7195.15,4878.5 h60
  text "4.49mil" at 8054.92,4878.5 h60
  text "4.2" at 8704.76,4878.5 h60
  text "OTHER +/-" at 12434.46,4802.73 h60
  text "23" at 5845.5,4758.5 h60
  text "GND7" at 6255.41,4758.5 h60
  text "Copper" at 7195.15,4758.5 h60
  text "0.71mil" at 8054.92,4758.5 h60
  text "BOW & TWIST:" at 11408.23,4657.54 h60
  text "X" at 12256.46,4657.54 h60
  text "ANSI IPC-6012 TYPE 3 CLASS 2" at 12434.48,4657.54 h60
  text "24" at 5845.5,4638.5 h60
  text "Dielectric 12" at 6255.41,4638.5 h60
  text "FR-4 High_Tg" at 7195.15,4638.5 h60
  text "4.16mil" at 8054.92,4638.5 h60
  text "4.2" at 8704.76,4638.5 h60
  text "25" at 5845.5,4518.5 h60
  text "Bottom Layer" at 6255.41,4518.5 h60
  text "Copper" at 7195.15,4518.5 h60
  text "2.60mil" at 8054.92,4518.5 h60
  text "OTHER +/-" at 12434.46,4510.85 h60
  text "26" at 5845.5,4398.5 h60
  text "Bottom Solder" at 6255.41,4398.5 h60
  text "Solder Resist" at 7195.15,4398.5 h60
  text "1.00mil" at 8054.92,4398.5 h60
  text "3.5" at 8704.76,4398.5 h60
  text "DRILLING:" at 11333.46,4380.23 h60
  text "27" at 5845.5,4278.5 h60
  text "Bottom Overlay" at 6255.41,4278.5 h60
  text "NC_DRILL FILES" at 13094.46,4275.04 h60
  text "REFERENCE:" at 11408.23,4271.1 h60
  text "X" at 12065.46,4271.01 h60
  text "AS SHOWN" at 12243.46,4271.1 h60
  text "X" at 12966.46,4271.1 h60
  text "OTHER" at 13392.46,4128.85 h60
  text "PTH COPPER THICKNESS:" at 11407.91,4125.32 h60
  text "X" at 12547.14,4125.32 h60
  text "20-30 um" at 12675.14,4125.32 h60
  text "BOARD FINISH:" at 11333.46,3977.73 h60
  text "SILKSCREEN:" at 11488.68,3867.6 h60
  text "X" at 12446.46,3867.6 h60
  text "TOP" at 12563.46,3867.6 h60
  text "X" at 12956.46,3867.6 h60
  text "BOTTOM" at 13074.46,3867.6 h60
  text "SILKSCREEN COLOR:" at 11488.68,3712.41 h60
  text "X" at 12445.46,3712.41 h60
  text "WHITE" at 12563.46,3712.41 h60
  text "OTHER" at 13074.46,3712.41 h60
  text "X" at 12576.46,3568.96 h60
  text "BLUE" at 12694.46,3568.96 h60
  text "OTHER" at 13312.46,3568.96 h60
  text "SOLDER RESIST COLOR:" at 11488.68,3562.1 h60
  text "X" at 12576.46,3414.71 h60
  text "MATTE" at 12694.46,3414.71 h60
  text "SEMI-GLOSS" at 13312,3414.07 h60
  text "IMMERSION GOLD (ENIG)" at 12394.46,3241.94 h60
  text "ENEPIG" at 13732,3234.72 h60
  text "SURFACE FINISH:" at 11333.46,3233.72 h60
  text "X" at 12216.46,3233.72 h60
  text "IMM. TIN/SILVER OR EQUIV" at 11663,3096.4 h60
  text "OTHER" at 13094.46,3092.47 h60
  text "ARRAY/PANEL:" at 11333.46,2937.09 h60
  text "CUT AND TRIM PER M1 BOARD OUTLINE" at 12394.46,2928.87 h60
  text "N.C. ROUTE" at 12394.46,2792.9 h60
  text "X" at 13082.46,2792.9 h60
  text "V. SCORE" at 13260.46,2792.9 h60
  text "CERTIFICATION:" at 11333.46,2663.77 h60
  text "MATERIALS AND WORKMANSHIP FOR ALL PCBS" at 12058.46,2663.77 h60
  text "TO MEET OR EXCEED THE REQUIREMENTS OF:" at 12058.46,2569.71 h60
  text "X" at 11695.97,2441.08 h60
  text "ANSI IPC-A-600F CLASS ->" at 11823.96,2441.08 h60
  text "X" at 13471.97,2441.08 h60
  text "2" at 13581.96,2441.08 h60
  text "1" at 13266.96,2439.58 h60
  text "3" at 13935.96,2439.58 h60
  text "X" at 12507.97,2293.39 h60
  text "RoHS" at 12635.96,2293.39 h60
  text "OTHER" at 13280.36,2293.39 h60
  text "PER ORDER" at 13677.42,2293.39 h60
  text "ALL BOARDS MUST MEET OR EXCEED UL94-V0 REQUIREMENTS." at 11361,2139.57 h60
  text "PCB MUST BEAR THE UL94V-0 UL REGISTERED MATERIAL ID NUMBER" at 11361,2023.5 h60
  text "ADDITIONAL REQUIREMENTS:" at 11333.46,1854.08 h60
  text "MICROSECTION:" at 11408.23,1746.95 h60
  text "YES" at 12313.96,1746.95 h60
  text "REQUIRED" at 13175.46,1602.62 h60
  text "BARE BOARD ELEC. TEST:" at 11408.23,1599.76 h60
  text "NONE" at 12713.96,1599.76 h60
  text "X" at 13057.46,1599.76 h60
  text "PER ORDER" at 13767.46,1599.76 h60
  text "XX MIL VIAS REQUIRE NON-CONDUCTIVE FILL AND PLANARIZE" at 11576.38,1394.82 h59
  text "XX MIL VIAS REQUIRE CONDUCTIVE FILL AND PLANARIZE" at 11584.38,1290.84 h60
  text "OUTER XX MIL VIAS REQUIRE 50 OHM SINGLE-ENDED IMPEDANCE" at 11583.39,1127.46 h58
  text "LAYER 2 & 3 (INNER LAYERS) XX MIL WIDE, XX MIL SPACE / TRACES REQUIRE 100 OHM DIFFERENTIAL IMPEDANCE" at 11575.39,891.74 h60
M11 Gerber Information:
  lines w10: -292,-930.17 6308,-930.17 ; -292,-726.83 6310,-726.83 ; -292,-523.5 -292,-1133.5 3713,-1133.5 6310,-1133.5 6310,-523.5 -291.5,-523.5 -291.5,-1133.5 1284,-1133.5 ; 2173,-1133.5 2173,-523.5 ; 3440,-726.83 3440,-523.5 ; 4280,-726.83 4280,-523.5 ; 4902,-1140 4902,-937.17
  text "ALL ARTWORK VIEWED FROM TOP SIDE" at -228.5,-655.67 h60
  text "BOARD #:" at 2248,-655.67 h60
  text "REV:" at 3638,-655.67 h60
  text ".PCB_Rev" at 3929.5,-655.67 h60
  text "SVN REV:" at 4476,-655.67 h60
  text ".VersionControl_RevNumber" at 4982,-655.67 h60
  text ".PRJ_Number" at 2720,-665 h60
  text "LAYER NAME =" at -228.5,-858.49 h60
  text "TID #:" at 2248,-859 h60
  text ".TID" at 2636,-871 h60
  text "PLOT NAME =" at -228.5,-1064.34 h60
  text ".plot_File_Name" at 577,-1064.34 h60
  text "GENERATED    :" at 2250,-1064.34 h60
  text ".Print_Date" at 3119.5,-1064.34 h60
  text ".Print_Time" at 3848.5,-1064.34 h60
  text "TEXAS INSTRUMENTS" at 5113,-1064.34 h60
M12 Stackup:
  lines w6: 5930,3066 6588,3066 9891,3066 10221,3066 ; 5930,3284 6588,3284 9891,3284 10219,3284 ; 5930,3502 6583,3502 10223,3502 ; 7070,2671 10217,2671 ; 7074,2671 7074,4015 ; 7074,3652 10221,3652 ; 7075,2671 5934,2671 5929,2676 5929,3829 ; 7076,2848 9891,2848 10220,2848 ; 7687,2668 7687,4017 ; 8412,2671 8412,4017 ; 9122,2669 9122,4017 ; 10221,2671 10221,4016 5930,4016 5930,3920 5930,3830 5929,3829 ; 10221,3829 6586,3829 5929,3829
  text "IMPEDANCE TABLE:" at 5930,4042 h60
  text "REFERENCE LAYER" at 9262,3894 h60
  text "IMPEDANCE" at 7139,3890 h60
  text "SEPARATION" at 8474,3889 h60
  text "LAYER NAME" at 6184,3887 h60
  text "TRACE WIDTH" at 7732,3880 h60
  text "50 OHM" at 7159,3713 h60
  text "6.25 MIL" at 7824,3708 h60
  text "GND1" at 9586,3701 h60
  text "TOP LAYER" at 6020,3625 h60
  text "6 MIL" at 8616,3563 h60
  text "90 OHM" at 7159,3560 h60
  text "5 MIL" at 7824,3553 h60
  text "GND1" at 9586,3545 h60
  text "50 OHM" at 7159,3353 h60
  text "SIGNAL LAYER 1" at 6020,3347 h60
  text "4 MIL" at 7824,3347 h60
  text "GND2" at 9586,3323 h60
  text "50 OHM" at 7159,3143 h60
  text "SIGNAL LAYER 2" at 6020,3137 h60
  text "4 MIL" at 7824,3137 h60
  text "GND7" at 9586,3119 h60
  text "50 OHM" at 7159,2925 h60
  text "6.25 MIL" at 7824,2923 h60
  text "GND7" at 9586,2878 h60
  text "BOTTOM LAYER" at 6024,2852 h60
  text "6 MIL" at 8636,2740 h60
  text "90 OHM" at 7159,2737 h60
  text "5 MIL" at 7824,2730 h60
  text "GND7" at 9586,2722 h60
  text "IMPEDANCE TOLERANCE:+/-10%" at 5926,2573 h60
M13 Component Bodies Top:
  text ".Layer_Name" at 577,-858.49 h60
M14 Component Bodies Bottom:
  text ".Layer_Name" at 577,-858.49 h60
M15 Courtyards Top:
  text ".Layer_Name" at 577,-858.49 h60
M16 Courtyards Bottom:
  text ".Layer_Name" at 577,-858.49 h60
Drill Drawing:
  circle w10: c4546.62,2235.28 r33.33
  circle w10: c4546.62,885.28 r20
  circle w10: c4546.62,885.28 r33.33
  lines w10: 4513.29,618.61 4579.96,618.61 4546.62,551.94 4513.29,618.61 ; 4513.29,701.94 4546.62,718.61 4579.96,701.94 4563.29,735.28 4579.96,768.61 4546.62,751.94 4513.29,768.61 4529.96,735.28 4513.29,701.94 ; 4513.29,1001.94 4579.96,1001.94 4579.96,1068.61 4513.29,1068.61 4513.29,1001.94 ; 4513.29,1168.61 4529.96,1168.61 4546.62,1151.94 4563.29,1168.61 4579.96,1168.61 4563.29,1185.28 4579.96,1201.94 4563.29,1201.94 4546.62,1218.61 4529.96,1201.94 4513.29,1201.94 4529.96,1185.28 4513.29,1168.61 ; 4513.29,1368.61 4579.96,1368.61 4546.62,1301.94 4513.29,1368.61 ; 4513.29,1451.94 4579.96,1451.94 4579.96,1518.61 4513.29,1518.61 4513.29,1451.94 ; 4513.29,1635.28 4546.62,1601.94 4579.96,1635.28 4546.62,1668.61 4513.29,1635.28 ; 4513.29,1768.61 4529.96,1768.61 4529.96,1751.94 4563.29,1751.94 4563.29,1768.61 4579.96,1768.61 4579.96,1801.94 4563.29,1801.94 4563.29,1818.61 4529.96,1818.61 4529.96,1801.94 4513.29,1801.94 4513.29,1768.61 ; 4513.29,1901.94 4513.29,1918.61 4529.96,1935.28 4513.29,1951.94 4513.29,1968.61 4529.96,1968.61 4546.62,1951.94 4563.29,1968.61 4579.96,1968.61 4579.96,1951.94 4563.29,1935.28 4579.96,1918.61 4579.96,1901.94 4563.29,1901.94 4546.62,1918.61 4529.96,1901.94 4513.29,1901.94 ; 4513.29,2068.61 4529.96,2068.61 4546.62,2051.94 4563.29,2068.61 4579.96,2068.61 4563.29,2085.28 4579.96,2101.94 4563.29,2101.94 4546.62,2118.61 4529.96,2101.94 4513.29,2101.94 4529.96,2085.28 4513.29,2068.61 ; 4526.62,715.28 4546.62,725.28 4566.62,715.28 4556.62,735.28 4566.62,755.28 4546.62,745.28 4526.62,755.28 4536.62,735.28 4526.62,715.28 ; 4526.62,1015.28 4566.62,1015.28 4566.62,1055.28 4526.62,1055.28 4526.62,1015.28 ; 4526.62,1175.28 4536.62,1175.28 4546.62,1165.28 4556.62,1175.28 4566.62,1175.28 4556.62,1185.28 4566.62,1195.28 4556.62,1195.28 4546.62,1205.28 4536.62,1195.28 4526.62,1195.28 4536.62,1185.28 4526.62,1175.28 ; 4526.62,1355.28 4566.62,1355.28 4546.62,1315.28 4526.62,1355.28
  lines w15: 4453.5,506.94 8426.43,506.94 ; 4453.5,2306.94 8426.43,2306.94 ; 5004.38,356.94 5004.38,2456.94 ; 5654.2,356.94 5654.2,2456.94 ; 6376.01,356.94 6376.01,2456.94 ; 6881.88,356.94 6881.88,2456.94 ; 4453.5,356.94 8426.43,356.94 8426.43,2456.94 4453.5,2456.94 4453.5,356.94
  text "Symbol" at 4543.5,2351.94 h72
  text "Count" at 5049.38,2351.94 h72
  text "Hole Size" at 5699.2,2351.94 h72
  text "Plated" at 6421.01,2351.94 h72
  text "Drill Layer Pair" at 6926.88,2351.94 h72
  text "DRILL TOLERANCE" at 9231,2209 h60
  text "425" at 5049.38,2201.94 h60
  text "6.00mil" at 5699.2,2201.94 h60
  text "PTH" at 6421.01,2201.94 h60
  text "Top Layer - Bottom Layer" at 6926.88,2201.94 h60
  text "FOR 7.87MIL DRILL +0/-7.87MIL" at 9021,2072.95 h60
  text "27" at 5049.38,2051.94 h60
  text "7.87mil" at 5699.2,2051.94 h60
  text "PTH" at 6421.01,2051.94 h60
  text "Top Layer - Bottom Layer" at 6926.88,2051.94 h60
  text "FOR 6MIL DRILL +0/-6MIL" at 9021,1982.4 h60
  text "96" at 5049.38,1901.94 h60
  text "8.00mil" at 5699.2,1901.94 h60
  text "PTH" at 6421.01,1901.94 h60
  text "Top Layer - Bottom Layer" at 6926.88,1901.94 h60
  text "FOR 8MIL DRILL +0/-8MIL" at 9021,1891.85 h60
  text "FOR 10MIL DRILL +0/-10MIL" at 9021,1813.11 h60
  text "429" at 5049.38,1751.94 h60
  text "10.00mil" at 5699.2,1751.94 h60
  text "PTH" at 6421.01,1751.94 h60
  text "Top Layer - Bottom Layer" at 6926.88,1751.94 h60
  text "FOR 12MIL DRILL +0/-12MIL" at 9021,1726.5 h60
  text "FOR 16MIL DRILL +0/-16MIL" at 9021,1644.96 h60
  text "28" at 5049.38,1601.94 h60
  text "12.00mil" at 5699.2,1601.94 h60
  text "PTH" at 6421.01,1601.94 h60
  text "Top Layer - Bottom Layer" at 6926.88,1601.94 h60
  text "FOR PTH DRILL +/-3MIL" at 9021,1561.23 h60
  text "14" at 5049.38,1451.94 h60
  text "15.75mil" at 5699.2,1451.94 h60
  text "PTH" at 6421.01,1451.94 h60
  text "Top Layer - Bottom Layer" at 6926.88,1451.94 h60
  text "1" at 5049.38,1301.94 h60
  text "16.00mil" at 5699.2,1301.94 h60
  text "PTH" at 6421.01,1301.94 h60
  text "Top Layer - Bottom Layer" at 6926.88,1301.94 h60
  text "2" at 5049.38,1151.94 h60
  text "17.72mil" at 5699.2,1151.94 h60
  text "PTH" at 6421.01,1151.94 h60
  text "Top Layer - Bottom Layer" at 6926.88,1151.94 h60
  text "23" at 5049.38,1001.94 h60
  text "20.00mil" at 5699.2,1001.94 h60
  text "PTH" at 6421.01,1001.94 h60
  text "Top Layer - Bottom Layer" at 6926.88,1001.94 h60
  text "4" at 5049.38,851.94 h60
  text "23.62mil" at 5699.2,851.94 h60
  text "PTH" at 6421.01,851.94 h60
  text "Top Layer - Bottom Layer" at 6926.88,851.94 h60
  text "2" at 5049.38,701.94 h60
  text "25.00mil" at 5699.2,701.94 h60
  text "PTH" at 6421.01,701.94 h60
  text "Top Layer - Bottom Layer" at 6926.88,701.94 h60
  text "13" at 5049.38,551.94 h60
  text "50.00mil" at 5699.2,551.94 h60
  text "PTH" at 6421.01,551.94 h60
  text "Top Layer - Bottom Layer" at 6926.88,551.94 h60
  text "1064 Total" at 5049.38,401.94 h60
  text "Slot definitions :" at 4543.5,256.97 h60
  text "Routed Path Length" at 5576.19,256.97 h60
  text "= Calculated from tool start centre position to tool end centre position." at 6678.86,256.97 h60
  text "Hole Length" at 5576.19,156.99 h60
  text "= Routed Path Length + Tool Size = Slot length as defined in the PCB layout" at 6268.99,156.99 h60
  text ".Layer_Name" at 577,-858.49 h60
M17 Embedded Cavity:
  text ".Layer_Name" at 577,-858.49 h60
M18 Embedded Assembly:
  text ".Layer_Name" at 577,-858.49 h60
M19 Embedded Keepout:
  text ".Layer_Name" at 577,-858.49 h60

## Dimensions
0,3543.31 to 0,0 on M2 Board Dimensions
0,0 to 1771.65,0 on M2 Board Dimensions
0,-400 to 1000,-400 on M2 Board Dimensions

## Text inside footprints (layer, text, board x,y; h text height)
Logo2: Top Overlay "Pb" at 929.4,779.1 h60
Logo3: Top Overlay "For evaluation only; not FCC approved for resale." at 1759,1445 h60 r90
ZZ1: M5 Assembly Top "Install label in silkscreened box after final wash.  Text shall be 8 pt font.  Text shall be per the Label Table in the PDF schematic." at 310,5021 h40